# Altium PCB UC-526 - 2.PcbDoc
Units mil, origin at the board's own origin, x right, y up, seen from the top; angles counter-clockwise.
Board outline 1574.8 x 1574.8 mil, 2 copper layers (Top Layer, Bottom Layer); 116 components, 127 nets, 544 pads, 98 vias.
Unrouted connection lines stored in the file: 1.
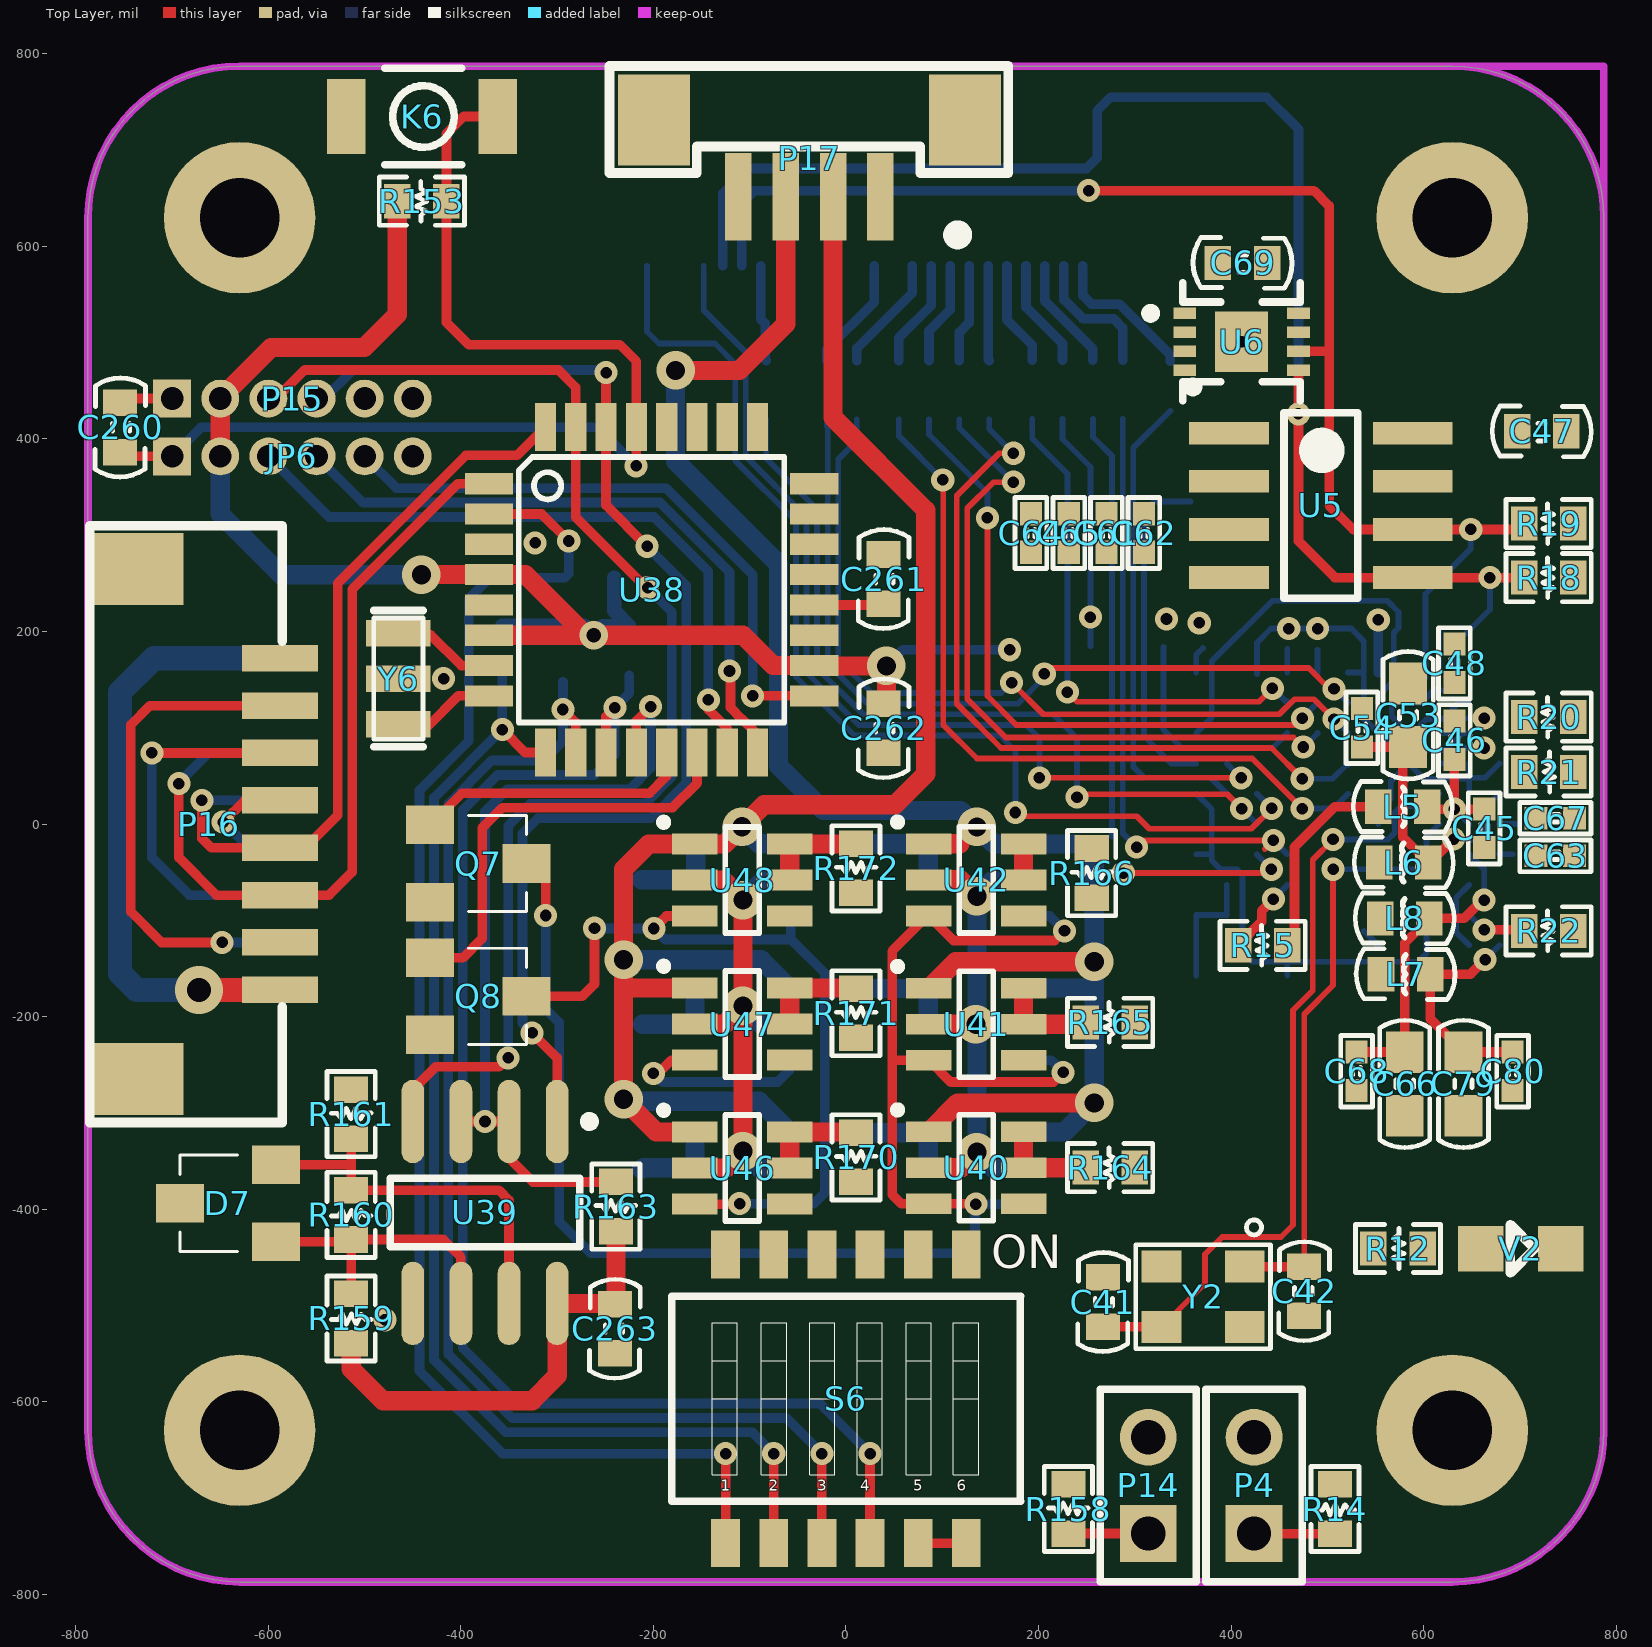
[diagram p0: Top Layer view]
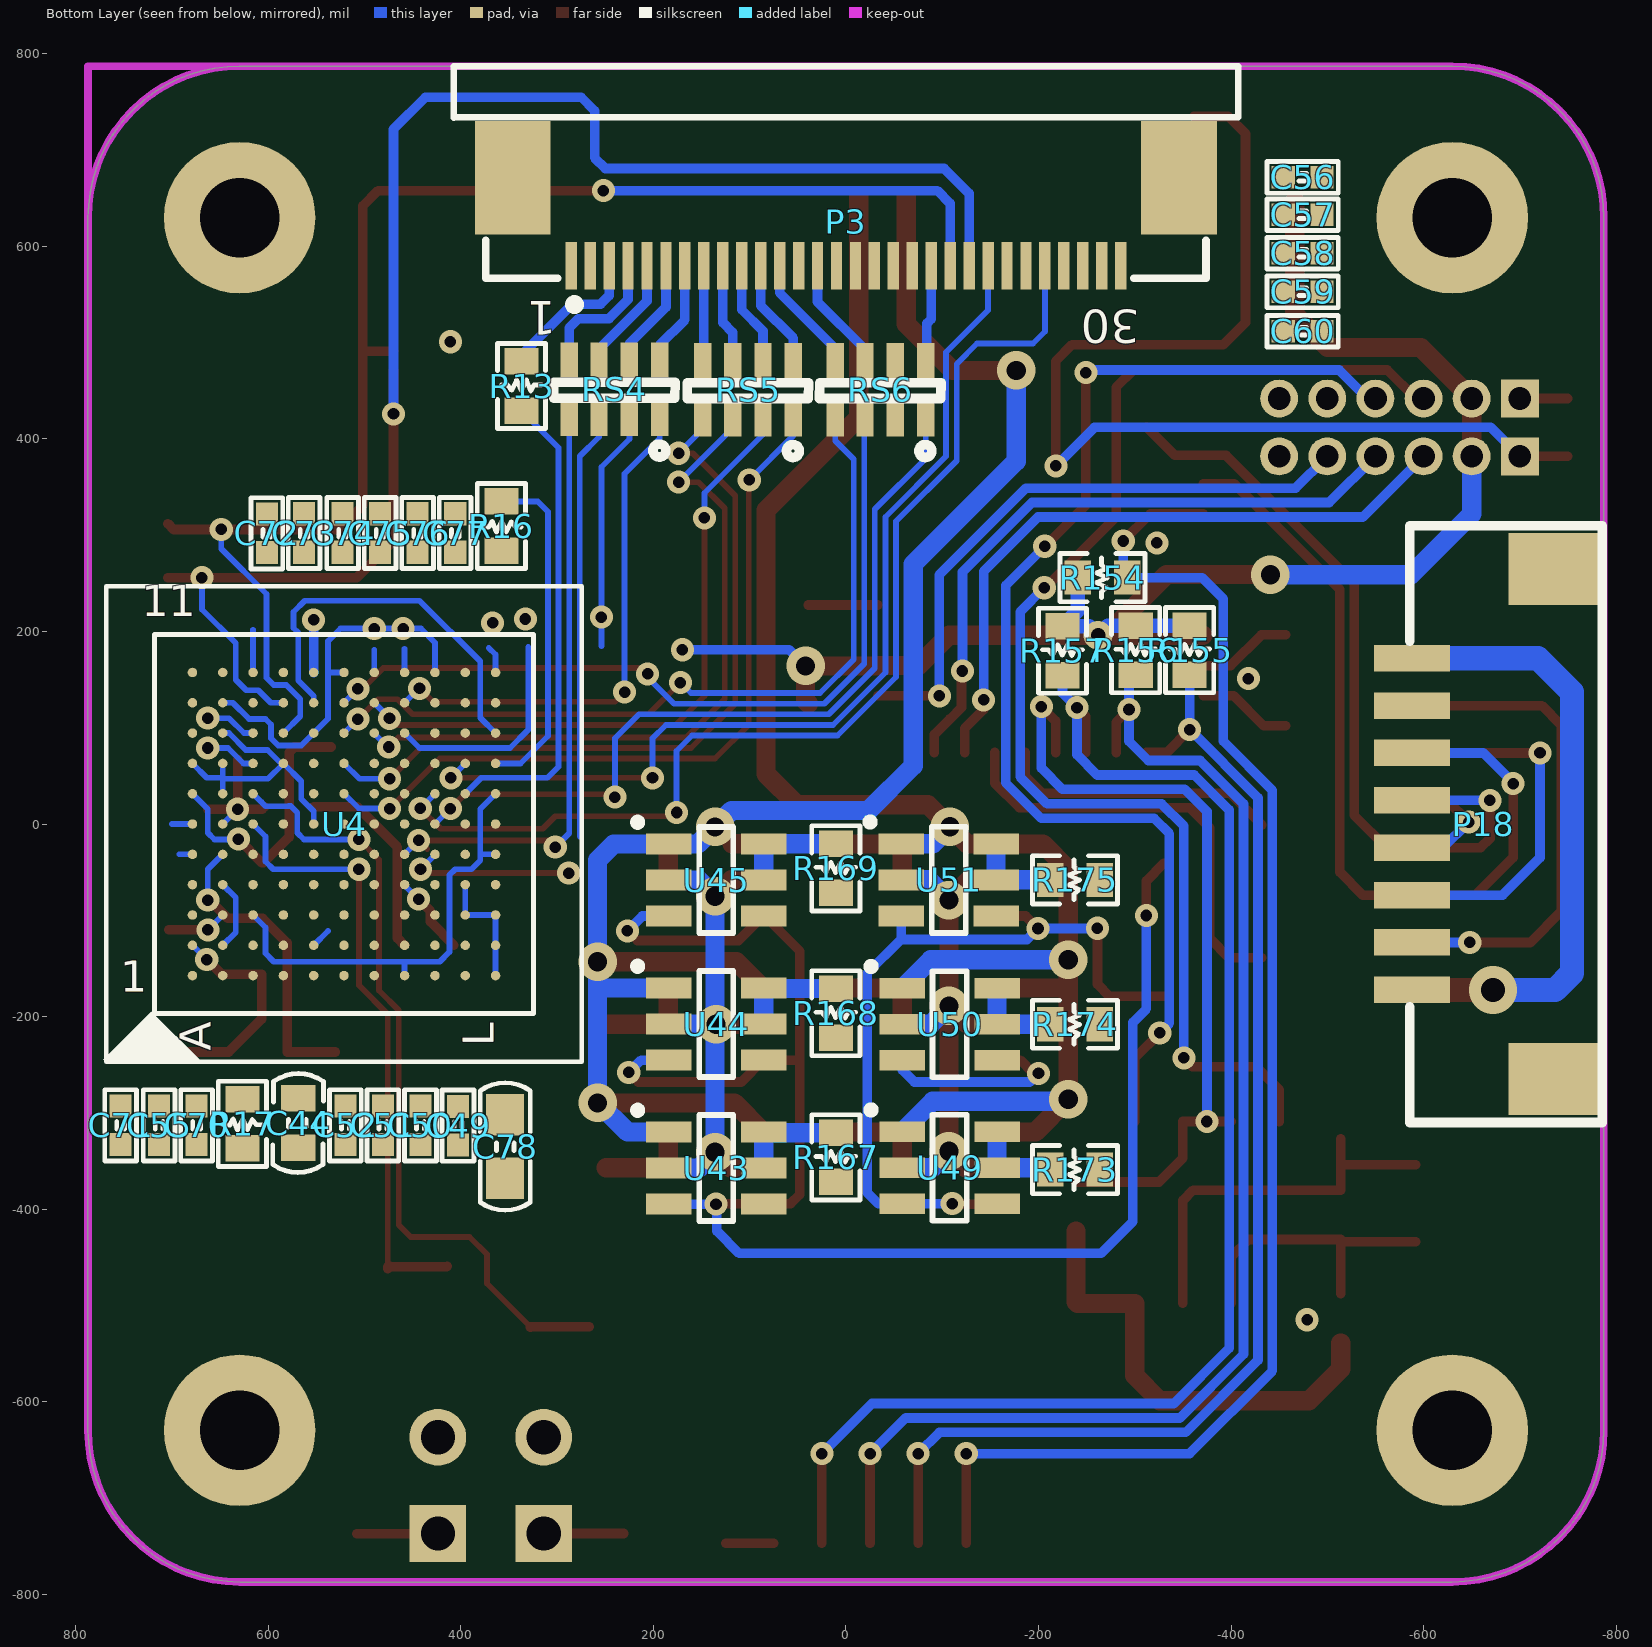
[diagram p1: Bottom Layer view, seen from below]

## Layer stack, top to bottom
Top Layer: signal copper 1.4
Dielectric: dielectric 12.6, FR-4, Dk 4.8
Bottom Layer: signal copper 1.4

## Board outline
-787.4,-629.92 -787.4,629.92 cw(c-629.92,629.92) -629.92,787.4 629.92,787.4 cw(c629.92,629.92) 787.4,629.92 787.4,-629.92 cw(c629.92,-629.92) 629.92,-787.4 -629.92,-787.4 cw(c-629.92,-629.92)

## Design rules (kind name [scope] priority, off if disabled: settings)
Clearance [All] p1: gap=5
DiffPairsRouting [All] p1: maxlimit=10 minlimit=10 mostfreqgap=10 maxuncoupledlength=500
PolygonConnect [All] p1: connectstyle=Relief reliefconductorwidth=10 reliefentries=4 polygonreliefangle="90 Angle"
RoutingVias [All] p1: holewidth=28 width=50 viastyle="Through Hole" minholewidth=28 minwidth=50 maxholewidth=28 maxwidth=50
SilkscreenOverComponentPads [All] p1: minsilkscreentomaskgap=10
SolderMaskExpansion [All] p1: expansion=4
Width [All] p1: maxlimit=50 minlimit=5 preferedwidth=10
26 further rules are at their usual default settings.

## Classes and differential pairs
differential pair SST: +SST_P -SST_N

## Components (designator, comment, footprint, x,y, rotation, side; value= is the part's Value field where it differs from the comment)
C41 "12pF" 0603S-CAP 267,-496.59 r270 top
C42 "12pF" 0603S-CAP 476,-485.41 r90 top
C44 "0.1u" 0603S-CAP 569,-310.59 r90 bottom
C45 "0.1u" C0402 663,-4.41 r270 top
C46 "0.01u" C0402 632,87 r90 top
C47 "0.1uF" 0603S-CAP 722.8,408 r180 top
C48 "0.1u" C0402 632,167 r270 top
C49 "0.01u" C0402 403,-313.31 r270 bottom
C50 "0.01u" C0402 442,-313 r270 bottom
C51 "0.01u" C0402 481,-313 r270 bottom
C52 "0.01u" C0402 520,-313 r270 bottom
C53 "2.2u" C0805S-CAP 584,113 r90 top
C54 "0.1u" C0402 536,100 r90 top
C55 "0.01u" C0402 713.5,-313 r270 bottom
C56 "0.01u" C0402 -474.31,671.84 r180 bottom
C57 "0.01u" C0402 -474.31,632.92 r180 bottom
C58 "0.01u" C0402 -474.31,592.92 r180 bottom
C59 "0.01u" C0402 -474.31,552.92 r180 bottom
C60 "0.01u" C0402 -474.31,511.92 r180 bottom
C61 "0.1u" C0402 270.5,302.31 r90 top
C62 "0.1u" C0402 309.5,302.31 r90 top
C63 "0.1u" C0402 737,-33 r180 top
C64 "0.1u" C0402 192.08,302.31 r90 top
C65 "0.1u" C0402 231.5,302.31 r90 top
C66 "22u" C0805S-CAP 580.5,-270 r270 top
C67 "0.1u" C0402 737,6 r180 top
C68 "0.1u" C0402 530.5,-256.82 r270 top
C69 "0.1u" 0603S-CAP 412,583 r180 top
C70 "0.1u" C0402 674.58,-313 r270 bottom
C71 "0.1u" C0402 753.5,-313 r270 bottom
C72 "0.1u" C0402 601.5,302 r90 bottom
C73 "0.1u" C0402 562.84,302.31 r90 bottom
C74 "0.1u" C0402 522.92,302.31 r90 bottom
C75 "0.1u" C0402 483.92,302.31 r90 bottom
C76 "0.1u" C0402 444.92,302.31 r90 bottom
C77 "0.1u" C0402 405.92,302.31 r90 bottom
C78 "22u" C0805S-CAP 354,-335 r270 bottom
C79 "22u" C0805S-CAP 641.5,-270 r270 top
C80 "0.1u" C0402 692.5,-256.82 r270 top
C260 "0.1uF" C0603 -754,412 r90 top
C261 "0.1uF" C0603 39,254.41 r90 top
C262 "0.1uF" C0603 39,99.41 r90 top
C263 "0.1u" C0603 -240,-524.39 r270 top
D7 "SM712" SOT23-3 -642,-394 r90 top
JP6 "Header 3X2" MHDR1X6 -700,382 r0 top
K6 "SW-PB" 157SW -519,735 r180 top
L5 "磁珠" L0603 578.41,18 r180 top
L6 "磁珠" L0603 579.41,-40 r0 top
L7 "磁珠" L0603 581.41,-156 r0 top
L8 "磁珠" L0603 580.41,-98 r0 top
P3 "30PIN" FH12-30S-0.5SH 0,625.55 r180 bottom locked
P4 "Header 2" HDR1X2 424,-737 r90 top
P14 "Header 2" HDR1X2 314,-737 r90 top
P15 "FTDI Basic" MHDR1X6 -700,442 r0 top
P16 "Header 8" SH_1.25MM*8 -735.66,0 r270 top locked
P17 "Header 4" SMT_1.25MM*4 -38,692 r0 top
P18 "Header 8" SH_1.25MM*8 -735.66,0 r90 bottom locked
Q7 "BSS138" "SOT-23 (STANDARD)" -432,-1 r270 top
Q8 "BSS138" "SOT-23 (STANDARD)" -432,-139 r270 top
R12 "10K" 0603S-RES 573.41,-441 r180 top
R13 "0" 0603S-RES 337,455 r270 bottom
R14 "4.7K" 0603S-RES 508,-711.59 r90 top
R15 "4.7K" 0603S-RES 432.88,-125.96 r0 top
R16 "4.7K" 0603S-RES 358,309.53 r90 bottom
R17 "4.7K" 0603S-RES 627,-311.41 r90 bottom
R18 "4.7K" 0603S-RES 730,256 r0 top
R19 "4.7K" 0603S-RES 730,312 r0 top
R20 "0" 0603S-RES 730,111 r0 top
R21 "6.04K-1%" 0603S-RES 730,54 r180 top
R22 "200-1%" 0603S-RES 730,-111 r0 top
R153 "10K" R0603 -440.59,647 r180 top
R154 "10K" R0603 -266.41,256 r0 bottom
R155 "10K" R0603 -357,180.59 r90 bottom
R156 "10K" R0603 -301,180.59 r90 bottom
R157 "10K" R0603 -225,180 r90 bottom
R158 "10K" R0603 231,-711.59 r90 top
R159 "4.7K" R0603 -514,-513.59 r270 top
R160 "120" R0603 -514,-406 r270 top
R161 "4.7K" R0603 -514,-301.41 r90 top
R163 "10K" R0603 -239,-397.41 r90 top
R164 "5.1" R0603 274.49,-357 r180 top
R165 "5.1" R0603 274.49,-206 r180 top
R166 "5.1" R0603 255.28,-51 r90 top
R167 "5.1" R0603 10.5,-346.21 r90 bottom
R168 "5.1" R0603 10.5,-196.55 r90 bottom
R169 "5.1" R0603 10.5,-45.96 r90 bottom
R170 "5.1" R0603 10.5,-346.21 r90 top
R171 "5.1" R0603 10.5,-196.55 r90 top
R172 "5.1" R0603 10.5,-45.96 r90 top
R173 "5.1" R0603 -237.92,-359 r0 bottom
R174 "5.1" R0603 -237.92,-208 r0 bottom
R175 "5.1" R0603 -237.92,-58 r0 bottom
RS4 "22" NC06-4 193.1,420.84 r0 bottom
RS5 "22" NC06-4 54.34,420.33 r0 bottom
RS6 "22" NC06-4 -83.17,420.33 r0 bottom
S6 "SW DIP-6" DIP_SW_6WAY_SMD 0,-597 r0 top locked
U4 "FX3_121_BUMP_0" 121_BGA_FX3 521.45,0 r90 bottom locked
U5 "M24M02-DRMN6TP" SOIC127P600X175-8N 493.42,331 r0 top
U6 "ATSHA204-MAH-DA-T" UDFN 411,501 r0 top
U38 "ATMEGA328" TQFP32-08 -202,243.34 r0 top locked
U39 "MAX485CSA" SOIC-8 -375,-403.51 r270 top
U40 "AL5802" SOT26 135.28,-357 r0 top
U41 "AL5802" SOT26 135.28,-208 r0 top
U42 "AL5802" SOT26 135.28,-58 r0 top
U43 "AL5802" SOT26 134.72,-357.4 r180 bottom
U44 "AL5802" SOT26 134.72,-207.79 r180 bottom
U45 "AL5802" SOT26 134.72,-58.19 r180 bottom
U46 "AL5802" SOT26 -107.72,-357.4 r0 top
U47 "AL5802" SOT26 -107.72,-207.79 r0 top
U48 "AL5802" SOT26 -107.72,-58.19 r0 top
U49 "AL5802" SOT26 -107.72,-357 r180 bottom
U50 "AL5802" SOT26 -107.72,-208 r180 bottom
U51 "AL5802" SOT26 -106.72,-58 r180 bottom
V2 "Red" LED0805S 701,-441 r0 top
Y2 "19.2MHZ" "爱普生晶振3.2×2.5MM - 无源" 371,-491 r180 top
Y6 "16MHz" RESONATOR-SMD -465,151 r90 top

## Footprints (in the part's own frame and the unit in brackets; to place one, negate y for a bottom-side part, rotate by r counter-clockwise, add the part's x,y. Pads: shape width x height; smd on the part's side, far side on the other; paste and mask are expansions set on the pad)
121_BGA_FX3 [mil]
  round 9.85 smd: A1(-157.45,157.45) A2(-125.96,157.45) A3(-94.47,157.45) A4(-62.98,157.45) A5(-31.49,157.45) A6(0,157.45) A7(31.49,157.45) A8(62.98,157.45) A9(94.47,157.45) A10(125.96,157.45) A11(157.45,157.45) B1(-157.45,125.96) B2(-125.96,125.96) B3(-94.47,125.96) B4(-62.98,125.96) B5(-31.49,125.96) B6(0,125.96) B7(31.49,125.96) B8(62.98,125.96) B9(94.47,125.96) B10(125.96,125.96) B11(157.45,125.96) C1(-157.45,94.47) C2(-125.96,94.47) C3(-94.47,94.47) C4(-62.98,94.47) C5(-31.49,94.47) C6(0,94.47) C7(31.49,94.47) C8(62.98,94.47) C9(94.47,94.47) C10(125.96,94.47) C11(157.45,94.47) D1(-157.45,62.98) D2(-125.96,62.98) D3(-94.47,62.98) D4(-62.98,62.98) D5(-31.49,62.98) D6(0,62.98) D7(31.49,62.98) D8(62.98,62.98) D9(94.47,62.98) D10(125.96,62.98) D11(157.45,62.98) E1(-157.45,31.49) E2(-125.96,31.49) E3(-94.47,31.49) E4(-62.98,31.49) E5(-31.49,31.49) E6(0,31.49) E7(31.49,31.49) E8(62.98,31.49) E9(94.47,31.49) E10(125.96,31.49) E11(157.45,31.49) F1(-157.45,0) F2(-125.96,0) F3(-94.47,0) F4(-62.98,0) F5(-31.49,0) F6(0,0) F7(31.49,0) F8(62.98,0) F9(94.47,0) F10(125.96,0) F11(157.45,0) G1(-157.45,-31.49) G2(-125.96,-31.49) G3(-94.47,-31.49) G4(-62.98,-31.49) G5(-31.49,-31.49) G6(0,-31.49) G7(31.49,-31.49) G8(62.98,-31.49) G9(94.47,-31.49) G10(125.96,-31.49) G11(157.45,-31.49) H1(-157.45,-62.98) H2(-125.96,-62.98) H3(-94.47,-62.98) H4(-62.98,-62.98) H5(-31.49,-62.98) H6(0,-62.98) H7(31.49,-62.98) H8(62.98,-62.98) H9(94.47,-62.98) H10(125.96,-62.98) H11(157.45,-62.98) J1(-157.45,-94.47) J2(-125.96,-94.47) J3(-94.47,-94.47) J4(-62.98,-94.47) J5(-31.49,-94.47) J6(0,-94.47) J7(31.49,-94.47) J8(62.98,-94.47) J9(94.47,-94.47) J10(125.96,-94.47) J11(157.45,-94.47) K1(-157.45,-125.96) K2(-125.96,-125.96) K3(-94.47,-125.96) K4(-62.98,-125.96) K5(-31.49,-125.96) K6(0,-125.96) K7(31.49,-125.96) K8(62.98,-125.96) K9(94.47,-125.96) K10(125.96,-125.96) K11(157.45,-125.96) L1(-157.45,-157.45) L2(-125.96,-157.45) L3(-94.47,-157.45) L4(-62.98,-157.45) L5(-31.49,-157.45) L6(0,-157.45) L7(31.49,-157.45) L8(62.98,-157.45) L9(94.47,-157.45) L10(125.96,-157.45) L11(157.45,-157.45)
  silkscreen extent -247,-247 247,250
157SW [mil]
  rect 40x78 smd: 1(0,0) 2(-157.5,0)
  silkscreen extent -120,-50 -40,50
0603S-CAP [mm]
  rect 0.7x0.9 smd: 1(-0.65,0) 2(0.65,0)
  silkscreen extent -1.31,-0.67 1.31,0.67
0603S-RES [mm]
  rect 0.7x0.9 smd: 1(-0.65,0) 2(0.65,0)
  silkscreen extent -1.12,-0.64 1.12,0.64
C0402 [mil]
  rect 24x23 smd: 1(-20,0) 2(20,0)
  silkscreen extent -37,-17 37,17, body extent -20,-10 19,10, height 20
C0603 [mm]
  rect 0.7x0.9 smd: 1(0.65,0) 2(-0.65,0)
  silkscreen extent -1.31,-0.67 1.31,0.67
C0805S-CAP [mm]
  rect 1.1x1 smd: 1(0.838,0) 2(-0.838,0)
  silkscreen extent -1.68,-0.66 1.68,0.66
DIP_SW_6WAY_SMD [mm]
  rect 0.76x1.27 smd: 1(-3.175,-3.81) 2(-1.905,-3.81) 3(-0.635,-3.81) 4(0.635,-3.81) 5(1.905,-3.81) 6(3.175,-3.81) 7(3.175,3.81) 8(1.905,3.81) 9(0.635,3.81) 10(-0.635,3.81) 11(-1.905,3.81) 12(-3.175,3.81)
  silkscreen extent -4.6,-2.7 4.6,2.7
FH12-30S-0.5SH [mm]
  rect 0.3x1.25 smd: 1(-7.25,-1.162) 2(-6.75,-1.162) 3(-6.25,-1.162) 4(-5.75,-1.162) 5(-5.25,-1.162) 6(-4.75,-1.162) 7(-4.25,-1.162) 8(-3.75,-1.162) 9(-3.25,-1.162) 10(-2.75,-1.162) 11(-2.25,-1.162) 12(-1.75,-1.162) 13(-1.25,-1.162) 14(-0.75,-1.162) 15(-0.25,-1.162) 16(0.25,-1.162) 17(0.75,-1.162) 18(1.25,-1.162) 19(1.75,-1.162) 20(2.25,-1.162) 21(2.75,-1.162) 22(3.25,-1.162) 23(3.75,-1.162) 24(4.25,-1.162) 25(4.75,-1.162) 26(5.25,-1.162) 27(5.75,-1.162) 28(6.25,-1.162) 29(6.75,-1.162) 30(7.25,-1.162)
  rect 2x3 smd: 31(-8.79,1.163) 31(8.79,1.163)
  silkscreen extent -10.35,-2.31 10.35,4.11
HDR1X2 [mm]
  rect 1.5x1.5 hole 0.9: 1(0,0)
  round 1.5 hole 0.9: 2(2.54,0)
  silkscreen extent -1.27,-1.27 3.81,1.27
L0603 [mm]
  rect 0.7x0.9 smd: 1(-0.65,0) 2(0.65,0)
  silkscreen extent -1.31,-0.67 1.31,0.67
LED0805S [mm]
  rect 1.2x1.2 smd: 1(-1.05,0) 2(1.05,0)
  silkscreen extent -0.27,-0.64 0.36,0.63, body extent -0.98,-0.46 1.08,0.45, height 0.85
MHDR1X6 [mm]
  rect 1x1 hole 0.6: 1(0,0)
  round 1 hole 0.6: 2(1.27,0) 3(2.54,0) 4(3.81,0) 5(5.08,0) 6(6.35,0)
NC06-4 [mil]
  rect 18x36 smd: 1(94.4,-0.16) 2(63.39,-0.16) 3(31.9,-0.16) 4(0.4,-0.16) 5(0.4,-61.16) 6(31.9,-61.16) 7(63.39,-61.16) 8(94.4,-61.16)
  silkscreen extent -16,-38 111,40
R0603 [mm]
  rect 0.7x0.9 smd: 1(0.65,0) 2(-0.65,0)
  silkscreen extent -1.12,-0.64 1.12,0.64
RESONATOR-SMD [mm]
  rect 0.7x1.7 smd: 1(-1.2,0) 2(0,0) 3(1.2,0)
  silkscreen extent -1.8,-0.65 1.8,0.65
SH_1.25MM*8 [mm]
  rect 0.7x2 smd: 1(-4.375,3.75) 2(-3.125,3.75) 3(-1.875,3.75) 4(-0.625,3.75) 5(0.625,3.75) 6(1.875,3.75) 7(3.125,3.75) 8(4.375,3.75)
  rect 1.9x2.4 smd: 9(-6.731,0) 9(6.731,0)
  silkscreen extent -7.87,-1.27 7.87,3.81
SMT_1.25MM*4 [mm]
  rect 0.7x2.3 smd: 1(1.875,-1.025) 2(0.625,-1.025) 3(-0.625,-1.025) 4(-1.875,-1.025)
  rect 1.9x2.4 smd: 7(-4.1,1) 7(4.1,1)
  silkscreen extent -5.28,-2.16 5.25,2.42
SOIC127P600X175-8N [mm]
  rect 2.1x0.6 smd: 1(-2.425,1.905) 2(-2.425,0.635) 3(-2.425,-0.635) 4(-2.425,-1.905) 5(2.425,-1.905) 6(2.425,-0.635) 7(2.425,0.635) 8(2.425,1.905)
  silkscreen extent -3.5,-2.45 0.98,3.25, body extent -1.95,-2.45 1.95,2.45, height 1.75
SOIC-8 [mm]
  oval 2.2x0.6 smd: 1(-2.4,1.905) 2(-2.4,0.635) 3(-2.4,-0.635) 4(-2.4,-1.905) 5(2.4,-1.905) 6(2.4,-0.635) 7(2.4,0.635) 8(2.4,1.905)
  silkscreen extent -2.52,-2.5 0.9,2.88, body extent -2,-2.5 2,2.5, height 1.75
SOT23-3 [mil]
  rect 40x50 smd: 1(40,-50) 2(-40,-50) 3(0,50)
  silkscreen extent -50,-10 50,50, body extent -59,-52 59,46, height 42
SOT26 [mm]
  rect 1.2x0.55 smd: 1(-1.25,0.95) 2(-1.25,0) 3(-1.25,-0.95) 4(1.25,-0.95) 5(1.25,0) 6(1.25,0.95)
  silkscreen extent -2.17,-1.4 0.45,1.62
"SOT-23 (STANDARD)" [mil]
  rect 40x50 smd: D(40,100) G(0,0) S(80,0)
  silkscreen extent -10,40 90,100, body extent -19,-2 99,96, height 42
TQFP32-08 [mil]
  rect 50x22 smd: 1(-169,110.24) 2(-169,78.74) 3(-169,47.25) 4(-169,15.75) 5(-169,-15.74) 6(-168.99,-47.24) 7(-169,-78.74) 8(-169,-110.24) 17(169.01,-110.23) 18(169,-78.73) 19(169,-47.24) 20(169,-15.74) 21(169,15.75) 22(169,47.25) 23(169,78.74) 24(169,110.24)
  rect 22x50 smd: 9(-110.24,-169) 10(-78.74,-169) 11(-47.24,-168.99) 12(-15.74,-168.99) 13(15.75,-169) 14(47.25,-169) 15(78.74,-169) 16(110.24,-169) 25(110.24,169) 26(78.74,169) 27(47.25,169) 28(15.75,169) 29(-15.75,169) 30(-47.24,169) 31(-78.73,169) 32(-110.23,169)
  silkscreen extent -138,-138 138,138
UDFN [mm]
  rect 0.6x0.3 smd: 1(-1.5,0.75) 2(-1.5,0.25) 3(-1.5,-0.25) 4(-1.5,-0.75) 5(1.5,-0.75) 6(1.5,-0.25) 7(1.5,0.25) 8(1.5,0.75)
  rect 1.4x1.6 smd: 4(0,0)
  silkscreen extent -2.52,-1.55 1.55,1.55, body extent -1.5,-1 1.52,1, height 0.6
"爱普生晶振3.2×2.5MM - 无源" [mm]
  rect 1.05x0.85 smd: 1(-1.1,-0.8) 2(1.1,0.8) 3(1.1,-0.8) 4(-1.1,0.8)
  Top Layer pour cut-out: -1.778,1.372 -1.778,-1.372 1.778,-1.372 1.778,1.372
  silkscreen extent -1.78,-2.03 1.78,1.37

## Part data
C41 C42: library part "CAP CER SMT 4.3pF 0805", "CAP CER SMT 4.3pF 0805"
C44: library part Cap, "50V/8.2u/0805"
C45 C46 C48 C49 C50 C51 C52 C53 C54 C55 C56 C57 C58 C59 C60 C61 C62 C63 C64 C65 C66 C67 C68 C70 C71 C72 C73 C74 C75 C76 C77 C78 C79 C80: library part CAP0805, "Capacitor"
C47: library part "CAP SMT 0.1uF 16V X7R", "CAP SMT 0.1uF 16V X7R"
C69: library part CAP, "RC=1206"
C260 C261 C262: library part "CAP SMT C100nF25V10%X7R", "Capacitor"
C263: library part Cap, "Capacitor"
JP6: "Header, 3-Pin, Dual row"
K6: "Switch"
L5 L6 L7 L8: library part Inductor, "Inductor"
P3: library part "Header 30", "Header, 30-Pin"
P4 P14: "Header, 2-Pin"
P15: library part ARDUINO_SERIAL_PROGRAMPTH
P16 P18: "Header, 8-Pin"
P17: "Header, 4-Pin"
Q7 Q8: library part NMOS
R12 R13 R14 R15 R16 R17 R18 R19 R20 R21 R22 R153 R154 R155 R156 R157 R158 R159 R160 R161 R163 R164 R165 R166 R167 R168 R169 R170 R171 R172 R173 R174 R175: library part Res2, "Resistor"
RS4 RS5 RS6: library part RN4
S6: "DIP Switch, 6 Position, SPST"
U5: library part 24LC64-I/SN, "IC EEPROM 64KBIT 400KHZ 8SOIC"
U6: library part AT24C128
U38: library part ATMEGA168
U39: library part MAX3485CSA
V2: library part LED0, "Typical INFRARED GaAs LED"
Y2: library part "XTAL 32.768KHZ", "Crystal, CRYSTAL 32.768KHZ 6PF SMD"
Y6: library part RESONATORSMD

## Free pads (board coordinates)
  round 157.48 hole 82.68: 0(-629.92,-629.92) 0(-629.92,629.92) 0(629.92,-629.92) 0(629.92,629.92)

## Via types
v1: diameter 24, hole 12, Top Layer to Bottom Layer, tented both sides, 80 vias
v2: diameter 40, hole 20, Top Layer to Bottom Layer, tented both sides, 15 vias
v3: diameter 50, hole 25, Top Layer to Bottom Layer, tented both sides, 1 vias
v4: diameter 30, hole 15, Top Layer to Bottom Layer, tented both sides, 1 vias
v5: diameter 24, hole 12, Top Layer to Bottom Layer, 1 vias

## Nets (pads, with @x,y where several pads share a name; then routed paths per layer and width w, separated by ;. In a path a pad name is that pad's centre, name@x,y a point inside that pad or via, vN(x,y) a via of type N, cw(c..) or ccw(c..) an arc to the next point about the centre after c; other vN are vias at no path point)
A0: U38.23
A1: U38.24
A2: U38.25
A3: U38.26
A4: U38.27
A5: U38.28
A6: U38.19
A7: U38.22
AD1: R154.2 S6.1 U38.2 | length 1514.6
  Top Layer w10: U38.2 -316.09,322.09 v1(-288,294) ; S6.1 v1(-125,-654)
  Bottom Layer w10: v1@-287,293 v1(-288,294) -288,260 R154.2 -366,256 -370,256 -392,234 -392,86 -443,35 -443,-568 -357,-654 v1(-125,-654)
AD2: R155.2 S6.2 U38.9 | length 1282.3
  Top Layer w10: v1(-357,98) -333.34,74.34 U38.9 ; S6.2 v1(-75,-654)
  Bottom Layer w10: R155.2 v1(-357,98) -357.21,98 -428,27.21 -428,-557 -353,-632 -97,-632 v1(-75,-654)
AD3: R156.2 S6.3 U38.10 | length 1353.6
  Top Layer w10: v1(-294,119) -280.74,105.74 U38.10 ; S6.3 v1(-25,-654)
  Bottom Layer w10: R156.2@-294,148 v1(-294,119) -294,86 -314,66 -325,66 -368,66 -413,21 -413,-550.79 -346.79,-617 -62,-617 v1(-25,-654)
AD4: R157.2 S6.4 U38.11 | length 1441.5
  Top Layer w10: U38.11 -249.24,111.76 v1(-240,121) ; S6.4 v1(25,-654)
  Bottom Layer w10: R157.2 -225,136 v1(-240,121) -240,72 -261,51 -361.79,51 -398,14.79 -398,-544.57 -340.57,-602 -27,-602 v1(25,-654)
AREF: C261.2 U38.20 | length 72
  Top Layer w10: U38.20 C261.2@39,227.6
AVDD: C53.2 C54.1 L6.2 U4.A7 | length 302.6
  Top Layer w10: C54.1@535,80 572.82,80 578.41,74.41 578.41,-13.41 L6.2 606.93,-40 v1(631.18,-15.75)
  Bottom Layer w6: v1(631.18,-15.75) 625.75,-15.75 625.75,-14 632,-14 634,-16 656,-16 663,-9 663,15.59 U4.A7
CLK_OUT: U4.D6
D0_IO: P3.18
D1_IO: P3.17
D2: P16.5 P18.5 S6.8 U38.32 | length 805.9
  Top Layer w10: v1@-669,25 -669,-15 -659.39,-24.61 P16.5 ; P16.5@-586.63,-26 P16.5 ; U38.32 -341.58,383 -395,383 -528,250 -528,9 -561.61,-24.61 P16.5
  Bottom Layer w10: v1(-669,24.61) P18.5
D2_IO: P3.16
D3: P16.6 P18.6 S6.7 U38.1 | length 883
  Top Layer w10: v1@-693,43 -693,-35 -654.18,-73.82 P16.6 -536.82,-73.82 -513,-50 -513,243.79 -403.21,353.58 U38.1
  Bottom Layer w10: v1@-693,43 -662.18,73.82 P18.6
  other v1: -693,42
D3_IO: P3.15
D4_IO: P3.14 RS6.7 | length 118.7
  Bottom Layer w10: RS6.7 -19.78,493.22 29.53,542.53 P3.14
D5_IO: P3.12 RS6.8 | length 122.2
  Bottom Layer w10: RS6.8 11.23,494.23 68.9,551.9 P3.12
D6_IO: P3.11 RS5.5 | length 112.3
  Bottom Layer w10: RS5.5 54.74,504.74 88.58,538.58 P3.11
D7_IO: P3.10 RS5.6 | length 107.4
  Bottom Layer w10: RS5.6 86.23,512.23 108.27,534.27 P3.10
D8: R163.1 U38.12 U39.2 U39.3 | length 839.7
  Top Layer w10: U39.3 v1(-375,-309.02) U39.2 -350,-347 -325.18,-371.82 R163.1 ; U38.12 -217.75,107.25 v1(-203,122)
  Bottom Layer w10: v1(-375,-309.02) -375,13 -352,36 -225,36 -203,58 v1(-203,122)
D8_IO: P3.9 RS5.7 | length 102.5
  Bottom Layer w10: RS5.7 117.73,510.73 127.95,520.95 P3.9
D9: Q7.G U38.13 | length 291.4
  Top Layer w10: Q7.G -399,32 -204,32 -186.25,49.75 U38.13
D9_IO: P3.8 RS5.8 | length 98.7
  Bottom Layer w10: P3.8 147.64,482.6 RS5.8
D10: Q8.G U38.14 | length 463.8
  Top Layer w10: Q8.G -398,-139 -378,-119 -378,-4 -357,17 -248,17 ; -260,17 -248,17 ; U38.14 -154.75,42.25 -180,17 -248,17
D10_IO: P3.7 RS4.5 | length 108.6
  Bottom Layer w10: P3.7 167.32,523.68 193.5,497.5 RS4.5
D11_IO: P3.6 RS4.6 | length 113.5
  Bottom Layer w10: P3.6 187.01,536.99 225,499 RS4.6
DTR: C260.1 P15.1 | length 56.7
  Top Layer w10: C260.1@-749.59,442 P15.1 ; P15.1@-694,430 P15.1@-689,435
FRV_IO: P3.4 RS4.8 | length 141.7
  Bottom Layer w10: P3.4 226.38,544.84 246.21,525 278,525 287.5,515.5 RS4.8
FX3_CTL0: P3.23 U4.K8 | length 1008.6
  Top Layer w6: v1(201,48) v1(410.47,48)
  Bottom Layer w6: P3.23 -147.64,533.64 -104,490 -104,382 -41,319 -41,157.33 13.33,103 187,103 201,89 v1(201,48) ; U4.K8 v1(410.47,48)
FX3_CTL1: R13.2 U4.K7 | length 494.4
  Bottom Layer w6: R13.2 298.5,390.91 298.5,59.5 310,48 378.98,48 U4.K7
FX3_CTL2: P3.26 U4.J7 | length 1152.5
  Top Layer w6: v1(176,12) 180,8 302,8 315,-5 420.95,-5 v1(442.21,16.26)
  Bottom Layer w6: P3.26 -206.69,511.69 -194.19,499.19 -136.19,499.19 -115,478 -115,377.44 -52,314.44 -52,152.77 8.77,92 160,92 176,76 v1(176,12) ; U4.J7 v1(442.21,16.26)
FX3_CTL3: U4.H7
FX3_CTL4_SW: U4.G7
FX3_CTL5: U4.G6
FX3_CTL6: U4.K6
FX3_CTL7: U4.H8
FX3_CTL8: U4.G5 V2.2
FX3_CTL11: RS4.2 U4.J5 | length 619.7
  Top Layer w6: v1(288,-51) 438,-51 v1(442,-47)
  Bottom Layer w6: RS4.2 256.5,402.01 276.5,382 276.5,-13 ; U4.J5 426.98,-31.98 v1(442,-47)
FX3_CTL12: RS4.1 U4.H5 | length 629.1
  Top Layer w6: v1(302,-24) 309,-17 v1(443.98,-17) 434.98,-26
  Bottom Layer w6: RS4.1 287.5,-9.5 v1(302,-24) ; v1(443.98,-17) U4.H5
FX3_CTL15: R16.2 U4.L8 | length 352.2
  Bottom Layer w6: R16.2 320.12,335.12 309.5,324.5 309.5,91.48 338,62.98 U4.L8
FX3_DQ0: RS6.2 U4.F10 | length 846.8
  Top Layer w6: v1(206,156) 212,162 480.64,162 502.23,140.41 v1(507,140.41) v1@506.68,140.73
  Bottom Layer w6: RS6.2@-19.77,413.19 RS6.2 -19,419.72 -19,166.44 22.44,125 178.64,125 v1@204.79,151.16 ; v1(507,140.41) U4.F10
FX3_DQ1: RS6.1 U4.F9 | length 844
  Top Layer w6: v1(172,147) 205,114 450.2,114 465.93,129.73 486.19,129.73 v1(507,108.92) v1@507,112.13
  Bottom Layer w6: RS6.1 11.23,398.23 -8,379 -8,171 27,136 161,136 v1(172,147) ; v1(507,108.92) U4.F9
FX3_DQ2: RS5.4 U4.F7 | length 806.2
  Top Layer w6: v1@101,357.5 101,103 136,68 422,68 v1(474,16)
  Bottom Layer w6: RS5.4@54.74,413.68 RS5.4 54.74,403.26 v1(100.5,357.5) ; v1(474,16) 505.96,16 U4.F7
FX3_DQ3: RS5.3 U4.G10 | length 698.2
  Top Layer w6: v1(147,318) 147,133 177,103 467.48,103 v1(474.21,109.73)
  Bottom Layer w6: RS5.3@86.23,413.68 RS5.3 86.23,404.77 147,344 v1(147,318) ; v1(474.21,109.73) v1@474.21,108.43 ; U4.G10 474.87,110.87 474.87,109.08 v1@474.21,108.43 ; v1@474.21,108.43 471,105.21 474.21,105.21 v1@474.21,108.43
FX3_DQ4: RS5.2 U4.G9 | length 743.7
  Top Layer w6: v1(173.87,355.13) 153.13,355.13 126,328 126,130 166,90 465,90 v1(475,80)
  Bottom Layer w6: RS5.2 117.73,411.27 v1@179,350 ; v1@475.5,79.5 489.96,93.96 U4.G9
FX3_DQ5: RS5.1 U4.F8 | length 793.8
  Top Layer w6: v1(173.87,385.13) 159.13,385.13 115,341 115,125 161,79 345,79 ; 337,79 345,79 ; v1(474,47) 442,79 345,79
  Bottom Layer w6: RS5.1 148.74,410.26 v1(173.87,385.13) ; v1(474,47) 505.47,47 U4.F8 U4.F8@521.45,61.45
FX3_DQ6: RS4.4 U4.H10 | length 552.1
  Top Layer w6: v1(230,137) 240,127 429,127 v1(443,141)
  Bottom Layer w6: RS4.4@193.5,414.18 RS4.4 193.5,400.5 230,364 v1(230,137) ; v1(443,141) 443.43,141 U4.H10 U4.H10@458.47,127.53
FX3_DQ7: RS4.3 U4.H9 | length 483.6
  Bottom Layer w6: RS4.3@225,414.18 RS4.3 225,400 254,371 254,185 ; 330,184 330,98 349,79 443,79 U4.H9
  other v1: 333,213 254,215
FX3_DQ8: U4.J10
FX3_DQ9: U4.J9
FX3_DQ10: U4.K11
FX3_DQ11: U4.L10
FX3_DQ12: U4.K10
FX3_DQ13: U4.K9
FX3_DQ14: U4.J8
FX3_DQ15: U4.G8
FX3_I2S_SCL: P3.21 R19.1 U4.D9 U5.6 U6.6 | length 1505
  Top Layer w10: v1(252,658) 486,658 502,642 502,331 527,306 U5.6 v1(649,306) 698.41,306 R19.1 ; U6.6 501.16,491.16
  Bottom Layer w6: U4.D9 567,111.9 567,130 581.53,144.53 594.53,144.53 602,152 602,239 649,286 v1(649,306)
  Bottom Layer w10: P3.21 -108.27,644.73 -95,658 v1(252,658)
FX3_I2S_SDA: P3.22 R18.1 U4.D10 U5.5 U6.5 | length 1647.6
  Top Layer w10: U6.5 v1(470.06,426) 470.06,294 508.06,256 U5.5 656,256 ; v1(669,256) R18.1
  Bottom Layer w6: U4.D10 597.64,125.96 610.57,138.89 622.89,138.89 634,150 634,188 669,223 v1(669,256)
  Bottom Layer w10: P3.22 -127.95,655.05 -102,681 250,681 261,692 261,741 275,755 437,755 470.06,721.94 v1(470.06,426)
FX3_PCLK: RS6.4 U4.J6 | length 842.7
  Top Layer w6: v1(240,28) 243,31 395.98,31 v1(411,15.98)
  Bottom Layer w6: RS6.4 -82.77,379.77 -30,327 -30,161.89 17.89,114 215,114 240,89 v1(240,28) ; v1(411,15.98) U4.J6
FX3_RESET: C44.2 R17.2 U4.C5
FX3_SPI-MISO_UART-TX: U4.C2
FX3_SPI-MOSI_UART-RX: U4.D5
FX3_SPI-SCK_UART-RTS: U4.D4
FX3_SPI-SSN_UART-CTS: U4.C1
GND: C41.1 C42.1 C44.1 C45.2 C46.2 C47.1 C48.2 C49.2 C50.2 C51.2 C52.2 C53.1 C54.2 C55.2 C56.2 C57.2 C58.2 C59.2 C60.2 C61.2 C62.2 C64.2 C65.2 C66.1 C68.2 C69.2 C70.2 C71.2 C72.2 C73.2 C74.2 C75.2 C76.2 C77.2 C78.1 C79.1 C80.2 C261.1 C262.2 C263.1 D7.3 JP6.6 K6.1 P3.1 P3.13 P3.24 P3.25 P14.2 P15.5 P15.6 P16.1 P16.4 P16.7 P17.4 P18.1 P18.4 P18.7 Q7.S Q8.S R20.2 R21.2 R22.2 R158.1 R161.1 R164.2 R165.2 R166.2 R167.2 R168.2 R169.2 R170.2 R171.2 R172.2 R173.2 R174.2 R175.2 S6.9 S6.10 S6.11 S6.12 U4.A1 U4.A8 U4.B2 U4.B4 U4.B7 U4.B8 U4.B9 U4.D8 U4.E2 U4.E6 U4.G1 U4.G11 U4.K3 U4.K4 U4.L1 U4.L2 U4.L3 U4.L6 U4.L11 U5.4 U6.4 U38.3 U38.5 U38.21 U39.5 U40.4 U41.4 U42.4 U43.4 U44.4 U45.4 U46.4 U47.4 U48.4 U49.4 U50.4 U51.4 Y6.2 | length 701.3
  Top Layer w10: v1(-647,2) -624.39,24.61 P16.4
  Bottom Layer w6: U4.L1 U4.L2 U4.L3 U4.K3 U4.K4 ; U4.L11 364,176 371,183 ; U4.G11 489.96,180.96 ; 538,-111.02 U4.E2 ; U4.E6 552.94,13.21 565.86,26.14 565.86,44.42 U4.D8 ; U4.B2 634,-112.55 634,-76.39 U4.B4 ; U4.B7 647.41,47 ; U4.B8 647.41,47 ; U4.B9 641.03,94.47 623.56,77 600.79,77 586.78,62.98 U4.D8 ; 648.41,48 663.92,48 U4.A8 ; U4.D8 600.41,47 647.41,47
  Bottom Layer w10: v1(-647,2) -620.39,-24.61 P18.4
  other v1: -479,-515 -418,151 490,203 367,209 -323,292
  other v5: 411,501
LIV_IO: P3.5 RS4.7 | length 118.4
  Bottom Layer w10: P3.5 206.69,543.31 256.5,493.5 RS4.7
MISO: JP6.4 U38.16 | length 678.5
  Top Layer w10: v1(-121,159) -120,158 -120,121 -108.35,109.35 -108.12,109.35 -91.76,92.99 U38.16
  Bottom Layer w10: JP6.4 -502,334 -193.21,334 -121,261.79 v1(-121,159)
MOSI: JP6.3 U38.15 | length 702.9
  Top Layer w10: v1(-143,129) -143,119 -123.26,99.26 U38.15
  Bottom Layer w10: JP6.3 -537,319 -199.43,319 -143,262.57 v1(-143,129)
NetC45_1: C45.1 C46.1 L5.1 U4.B6 | length 135.3
  Top Layer w10: L5.1 606.59,15.41 v1(632,15.41) ; v1@632,13.41 v1@634,13.41 ; C46.1 v1(632,15.41) ; C45.1@662.82,15.41 v1(632,15.41)
  Bottom Layer w6: v1(632,15.41) U4.B6
NetP4_1: P4.1 R14.1 | length 84.1
  Top Layer w10: P4.1 424.18,-737.18 R14.1
NetP4_2: P4.2 U4.G4
NetQ7_D: Q7.D U40.3 U41.3 U42.3 U43.3 U44.3 U45.3 | length 1748.8
  Top Layer w10: Q7.D -330,-41 -312,-59 v1(-312,-95) ; 49.4,-245.4 U41.3 108.67,-268 215.65,-268 v1(225.63,-258.02) ; U42.3 111.67,-121 217,-121 ; U42.3@89,-91 48,-132 48,-385 57.4,-394.4 U40.3 v1@134.6,-394.4
  Bottom Layer w10: v1(-312,-95) -312,-192 -298,-206 -298,-413 -265,-446 111,-446 134.09,-422.91 v1@134.09,-394.8 ; v1(135,-394.8) U43.3 ; U44.3 212.81,-245.19 v1(225.63,-258.02) ; U45.3 211.59,-95.59 v1(227,-111)
NetQ8_D: Q8.D U46.3 U47.3 U48.3 U49.3 U50.3 U51.3 | length 1067.2
  Top Layer w10: Q8.D -274,-179 -261.25,-166.25 v1(-261.25,-108.25) ; v1(-199.5,-108.5) -186.59,-95.59 U48.3 ; v1@-194,-258 -181.19,-245.19 U47.3 ; U46.3@-163.8,-394.8 U46.3 -111.2,-394.8 v1@-111,-395
  Bottom Layer w10: v1@-261.25,-108.5 v1(-199.5,-108.5) -188,-120 -57,-120 ; v1(-200,-259) -191,-268 -146,-268 ; -171,-268 -146,-268 ; v1(-110.4,-394.4) U49.3 -33.4,-394.4 -22,-383 -22,-155 -57,-120 ; U50.3 -58.5,-255.5 -71,-268 -146,-268 ; U51.3 -57.5,-119.5 -57,-120
NetR12_1: R12.1 V2.1
NetR15_1: R15.1 U4.H4 | length 84.2
  Top Layer w10: R15.1 431.82,-101.43 431.82,-90.18 v1(444,-78)
  Bottom Layer w6: v1(444,-78) 458.47,-63.53 U4.H4
NetR21_1: R21.1 U4.C8 | length 53.7
  Bottom Layer w6: U4.C8 625.98,62.98 642,79 v1(663,79)
NetR22_1: R22.1 U4.B3 | length 62.2
  Top Layer w10: v1(662.94,-110) R22.1@703.19,-110
  Bottom Layer w6: U4.B3 v1(662.94,-110)
NetR164_1: R164.1 U40.5 U40.6 | length 101.8
  Top Layer w20: U40.6 U40.5 R164.1
NetR165_1: R165.1 U41.5 U41.6 | length 99.8
  Top Layer w20: U41.6 U41.5 R165.1@246.9,-208
NetR166_1: R166.1 U42.5 U42.6 | length 37.4
  Top Layer w20: U42.5 U42.6
NetR167_1: R167.1 U43.5 U43.6 | length 112.7
  Bottom Layer w20: R167.1 84.89,-320.62 U43.6 U43.5
NetR168_1: R168.1 U44.5 U44.6 | length 112.6
  Bottom Layer w20: R168.1 84.94,-170.96 U44.6 U44.5
NetR169_1: R169.1 U45.5 U45.6 | length 112
  Bottom Layer w20: R169.1 U45.6@85.09,-20.37 ; U45.5 U45.6
NetR170_1: R170.1 U46.5 U46.6 | length 105.8
  Top Layer w20: U46.5 U46.6 R170.1@9.88,-320
NetR171_1: R171.1 U47.5 U47.6 | length 105.8
  Top Layer w20: U47.5 U47.6 R171.1@9.93,-170.39
NetR172_1: R172.1 U48.5 U48.6 | length 106.6
  Top Layer w20: U48.5 U48.6 10.08,-20.79 R172.1
NetR173_1: R173.1 U49.5 U49.6 | length 93.6
  Bottom Layer w20: R173.1 -210.33,-357 U49.5 U49.6
NetR174_1: R174.1 U50.5 U50.6 | length 91.9
  Bottom Layer w20: R174.1@-211.41,-208 U50.5 U50.6
NetR175_1: R175.1 U51.5 U51.6 | length 93.8
  Bottom Layer w20: R175.1 U51.5 U51.6
OSC_IN: U38.7 Y6.3 | length 99.2
  Top Layer w10: Y6.3@-457,196.59 -431.59,196.59 -399.6,164.6 U38.7
OSC_OUT: U38.8 Y6.1 | length 98.8
  Top Layer w10: Y6.1@-457,102.1 -433.9,102.1 -402.89,133.11 U38.8
OTG_ID: R20.1 U4.C9 | length 53.5
  Bottom Layer w6: U4.C9 625.47,94.47 641,110 v1(663,110)
OUT1: P17.2 U46.1 U47.1 U48.1 U49.1 U50.1 U51.1 | length 1818.4
  Top Layer w20: -225.39,-170.39 U47.1 ; U46.1 -197,-320 v2(-231,-286) -231,-47 -204.79,-20.79 U48.1 -125.9,-20.79 v2(-108,-2.89) -85.11,20 51,20 83,52 83,326 -13.39,422.39 P17.2
  Bottom Layer w20: v2@-231,-288 -90.1,-288 U49.1 ; v2(-231,-141) -88.1,-141 U50.1 ; v2(-108,-2.89) -90.29,-20.6 U51.1
OUT2: P17.3 U40.1 U41.1 U42.1 U43.1 U44.1 U45.1 | length 1902.1
  Top Layer w20: v2(-177,471.19) -110.81,471.19 -62.61,519.39 P17.3 ; U40.1 115.89,-289.78 v2(258,-289.78) ; U41.1 113.67,-143 v2(258,-143) ; U42.1 118.48,-20.6
  Bottom Layer w20: v2@-177,471 -177,377 -70,270 -70,60.54 -23.46,14 118.92,14 v2(136,-3.08) 153.71,-20.79 U45.1 241.24,-20.79 258,-37.55 v2(258,-143) 258,-289 227,-320 U43.1 ; U44.1 257.61,-170.39
PCK_IO: P3.20 RS6.5 | length 100.7
  Bottom Layer w10: P3.20 -88.58,524.58 -84,520 -84,482.73 RS6.5
RESET: C260.2 JP6.1 K6.2 R153.2 U38.29 | length 1140.4
  Top Layer w10: C260.2@-749.59,382 JP6.1 ; K6.2 -397.11,735 -415,717.11 R153.2 -415,521 -392,498 -247.13,498 -235,498 -217.75,480.75 U38.29 -217.75,372.25 v1(-218,372)
  Bottom Layer w10: JP6.1 -670,412 -258,412 v1(-218,372)
RX/B: D7.1 P16.3 P18.3 R160.2 R161.2 U39.7 | length 797.6
  Top Layer w10: v1(-721,73.82) P16.3 ; D7.1 -514,-354 ; R161.2 R160.2 -360.59,-380.41 -350,-391 U39.7
  Bottom Layer w10: v1(-721,73.82) -721,-35 -682.18,-73.82 P18.3
RXI: P15.4 U38.30 U39.1 | length 1285.6
  Top Layer w10: v1(-326,-217) -300,-243 U39.1 ; v1(-249.24,469) U38.30 -249.24,331.24 v1(-206.52,288.52) v1@-203,285
  Bottom Layer w10: P15.4 -541.98,442 -512.3,471.69 -251.93,471.69 v1(-249.24,469) ; v1(-326,-217) -336,-207 -336,-10 -320,6 -202.79,6 -166,42.79 -166,248 v1(-206.52,288.52)
RXVDDQ: C79.2 C80.1 L7.2 U4.A2 | length 230.7
  Top Layer w10: v1(664,-140.86) 648.86,-156 L7.2 607,-202.5 C79.2 641.68,-236.82 C80.1
  Bottom Layer w6: v1(664,-140.86) U4.A2
SCK: JP6.5 U38.17 | length 644.8
  Top Layer w10: v1(-97,133.11) U38.17
  Bottom Layer w10: JP6.5 JP6.5@-499,381 ; JP6.5@-499,382 JP6.5@-499,381 ; v1(-97,133.11) -97,259 -187,349 -467,349 JP6.5@-499,381
SST_N: C67.2 U4.A6 | length 21.1
  Bottom Layer w6: U4.A6 700,0
SST_P: C63.2 U4.A5 | length 13.6
  Bottom Layer w6: U4.A5 692.49,-31.49
STB_IO: P3.2
TIGG_IO: P3.3 R13.1 | length 154
  Bottom Layer w10: P3.3 246.06,548.94 255,540 284.21,540 337,487.21 R13.1
TX/A: D7.2 P16.2 P18.2 R159.2 R160.1 U39.6 | length 827.1
  Top Layer w10: v1(-648,-123) -711,-123 -743,-91 -743,103 -722.97,123.03 P16.2 ; D7.2 R160.1@-516.41,-434 ; R159.2 R160.1 -418.41,-431.59 -400,-450 U39.6
  Bottom Layer w10: v1(-648,-123) P18.2
TXO: P15.3 U38.31 U39.4 | length 1362.2
  Top Layer w10: P15.3 -591.98,442 -562.3,471.69 -298.69,471.69 -280.74,453.74 U38.31 -280.74,318.74 v1@-207.5,245.5 ; U39.4 -450,-276 -426,-252 -360,-252 v1(-351,-243)
  Bottom Layer w10: v1(-351,-243) -351,-2 -328,21 -209,21 -181,49 -181,220.5 v1(-206,245.5)
TXVDDQ: C66.2 C68.1 L8.2 U4.B5 | length 318.8
  Top Layer w10: C68.1 C66.2@580.32,-236.82 ; C66.2 580.5,-123.5 L8.2 642,-98 660,-80 660,-79 v1(663,-79)
  Bottom Layer w6: U4.B5 663,-47.08 v1(663,-79)
USB_DS2_DM: U4.A10
USB_DS2_DP: U4.A9
USB_DS2_RXM: U4.A4
USB_DS2_RXP: U4.A3
USB_DS2_TXM: C67.1
USB_DS2_TXP: C63.1
UTIGGER: P14.1 R158.2 S6.5 S6.6 | length 149.4
  Top Layer w10: S6.5 S6.6 ; R158.2@231,-737 P14.1 P14.1@302.41,-748.59
VCC(+3.3V): C47.2 C55.1 C56.1 C57.1 C58.1 C59.1 C60.1 C69.1 C70.1 C71.1 C72.1 C73.1 C74.1 C75.1 C76.1 C77.1 L5.2 P3.27 P3.28 P3.29 P3.30 R12.2 R14.2 R15.2 R16.1 R17.1 R18.2 R19.2 U4.B1 U4.C11 U4.E3 U4.E10 U4.F1 U4.H11 U4.L9 U5.8 U6.8 | length 700.5
  Top Layer w10: R15.2 466,-118.43 466,-24 508,18 L5.2
  Bottom Layer w6: U4.L9 380,110.47 380,141 ; 380,154 380,141 ; U4.H11 458.47,182 ; U4.E10 552.94,132.94 569,149 569,198.72 574,203.72 574,220.28 562.28,232 443,232 380,169 380,141 ; U4.C11 615.92,201.92
  other v1: 460,203
VCC(+5V): C48.1 C262.1 C263.2 JP6.2 P15.2 R153.1 R154.1 R155.1 R156.1 R157.1 R159.1 R163.2 U4.E11 U38.4 U38.6 U38.18 U39.8 | length 2194.7
  Top Layer w20: JP6.2 P15.2 -597,495 -500.42,495 -466.18,529.24 R153.1 ; R159.1 -514,-566 -481,-599 -326,-599 -300,-573 U39.8 -240.8,-498 -239,-496.2 R163.2 ; v2(-441,259) -440.9,259.1 U38.4 -333.1,259.1 -270.11,196.11 U38.6 ; v4@-262,196 -107,196 -75.61,164.61 U38.18 ; U38.18@-32.57,164.18 v2(42,164.18) C262.1@42,128 ; C262.1 C262.1@41,127
  Bottom Layer w10: v2(42,164.18) 58.82,181 v1(170,181) ; U4.E11 v1(552.94,212)
  Bottom Layer w15: R155.1 R156.1 -272.07,206.18 v4(-262,196.11) ; v4@-252.52,205.59 R157.1 -240.82,221.41 R154.1
  Bottom Layer w20: JP6.2 -650,322 -587,259 v2(-441,259)
VCC_9V: P16.8 P17.1 P18.8 U40.2 U41.2 U42.2 U43.2 U44.2 U45.2 U46.2 U47.2 U48.2 U49.2 U50.2 U51.2 | length 1836
  Top Layer w20: U46.2 -124.4,-357.4 v2(-107,-340) v2(-107,-189) ; U47.2 -125.79,-207.79 v2(-107,-189) ; U48.2 -127.81,-58.19 v2(-107,-79) v2(-107,-189) ; U40.2 120,-357 v2(136,-341) ; U41.2 v2(135,-208) ; U42.2 119,-58 v2(136,-75)
  Top Layer w25: v3(-672.24,-172.24) P16.8
  Bottom Layer w20: v2(-107,-340) -90,-357 U49.2 ; v2(-107,-189) -88,-208 U50.2 ; v2(-107,-79) -86,-58 U51.2 ; v2@136.21,-207.79 U44.2 ; U43.2 152.4,-357.4 v2(136,-341) v2(136,-75) 152.81,-58.19 U45.2
  Bottom Layer w25: v3(-672.24,-172.24) -736.76,-172.24 -754,-155 -754,137 -718.76,172.24 P18.8
VDD(+1.2V): C49.1 C50.1 C51.1 C52.1 C61.1 C62.1 C64.1 C65.1 C78.2 L6.1 L7.1 L8.1 U4.B10 U4.C3 U4.E9 U4.F11 U4.H1 U4.J11 U4.L5 U4.L7 | length 868.8
  Bottom Layer w6: U4.L5 379.51,-31.49 380,-31 ; U4.L7 380,15.49 380,-31 ; U4.J11@426.98,155.98 U4.J11 426.98,188.42 441.56,203 525,203 538,190 538,157 ; U4.H1 458.47,-143 ; U4.F11 537.55,157.45 538,157 ; U4.C3 603,-107.39 603,-134.33 594.32,-143 458.47,-143 ; U4.B10 636.96,125.96 620,109 603,109 597.36,103.36 597.36,89.12 589.78,81.54 565.86,81.54 U4.E9 538,109.41 538,157 ; 380,-31 380,-38 389,-47 406,-47 412,-53 412,-133 422,-143 458.47,-143
XCK_IO: P3.19
XTAL_IN: C42.2 U4.C6 Y2.1 | length 635.1
  Top Layer w6: C42.2 476,-197.56 506,-167.56 v1(505.98,-47.02)
  Top Layer w10: Y2.1 414.62,-459.82 C42.2@474,-459.82 ; C42.2@473.68,-459.5 C42.2@474,-459.82 ; C42.2@476,-461.82 C42.2@474,-459.82 ; C42.2 C42.2@474,-459.82
  Bottom Layer w6: v1(505.98,-47.02) 595,-47 603,-39 603,-12.93 U4.C6
XTAL_OUT: C41.2 U4.C7 Y2.2 | length 823.8
  Top Layer w6: Y2.2 373,-477.19 373,-447 391,-429 452,-429 464.5,-416.5 464.5,-193.5 485,-173 485,-37 v1(505.97,-15.97) v1(505.97,-15.97)
  Top Layer w10: C41.2 327.38,-522.18 Y2.2 Y2.2@328,-522.8
  Bottom Layer w6: v1(505.97,-15.97) 563,-16 570,-9 570,12 576.82,18.82 578.82,18.82 579.08,18.57 603,18.57 610.21,25.79 ; 607.21,22.79 610.21,25.79 ; U4.C7 610.21,25.79
pads on no net: P3.31 P16.9 P17.7 P18.9 RS6.3 RS6.6 U4.A11 U4.B11 U4.C4 U4.C10 U4.D1 U4.D2 U4.D3 U4.D7 U4.D11 U4.E1 U4.E4 U4.E5 U4.E7 U4.E8 U4.F2 U4.F3 U4.F4 U4.F5 U4.F6 U4.G2 U4.G3 U4.H2 U4.H3 U4.H6 U4.J1 U4.J2 U4.J3 U4.J4 U4.K1 U4.K2 U4.K5 U4.L4 U5.1 U5.2 U5.3 U5.7 U6.1 U6.2 U6.3 U6.7 Y2.3 Y2.4

## Keep-outs
Keep-Out Layer:
  lines w7.87: 629.92,787.4 cw(c629.92,629.92) 787.4,629.92 ; 629.92,787.4 787.4,787.4 787.4,629.92 ; 629.92,787.4 -629.92,787.4 ccw(c-629.92,629.92) -787.4,629.92 -787.4,-629.92 ccw(c-629.92,-629.92) -629.92,-787.4 629.92,-787.4 ccw(c629.92,-629.92) 787.4,-629.92 787.4,629.92

## Text inside footprints (layer, text, board x,y; h text height)
P3: Bottom Overlay "30" at -305,545.55 h60 r180; Bottom Overlay "1" at 301,554.55 h60 r180
S6: Top Overlay "6" at 115,-697 h19.68; Top Overlay "5" at 70,-697 h19.68; Top Overlay "1" at -130,-697 h19.68; Top Overlay "2" at -80,-697 h19.68; Top Overlay "3" at -30,-697 h19.68; Top Overlay "4" at 15,-697 h19.68; Top Overlay "ON" at 151,-473 h60
U4: Bottom Overlay "L" at 355.05,-230.6 h55 r270; Bottom Overlay "A" at 649.05,-235.6 h55 r270; Bottom Overlay "11" at 731.45,205 h55; Bottom Overlay "1" at 753.95,-185.2 h55; Mechanical 15 "A" at 681.45,-230 h55 r270; Mechanical 15 "L" at 346.45,-229 h55 r270; Mechanical 15 "11" at 731.45,150 h55 r270; Mechanical 15 "1" at 736.45,-165 h55 r270; Mechanical 16 "E10" at 586.54,125.96 h55 r270; Mechanical 16 "D11" at 618.03,157.45 h55 r270; Mechanical 16 "A11" at 712.5,157.45 h55 r270; Mechanical 16 "C9" at 638.32,94.47 h55 r270; Mechanical 16 "F2" at 543.85,-125.96 h55 r270; Mechanical 16 "E3" at 575.34,-94.47 h55 r270; Mechanical 16 "F1" at 543.85,-157.45 h55 r270; Mechanical 16 "L9" at 386.4,94.47 h55 r270; Mechanical 16 "H11" at 492.07,157.45 h55 r270; Mechanical 16 "J4" at 449.38,-62.98 h55 r270; Mechanical 16 "F4" at 543.85,-62.98 h55 r270; Mechanical 16 "J3" at 449.38,-94.47 h55 r270; Mechanical 16 "J1" at 449.38,-157.45 h55 r270; Mechanical 16 "E4" at 575.34,-62.98 h55 r270; Mechanical 16 "E5" at 575.34,-31.49 h55 r270; Mechanical 16 "G2" at 512.36,-125.96 h55 r270; Mechanical 16 "F5" at 543.85,-31.49 h55 r270; Mechanical 16 "K2" at 417.89,-125.96 h55 r270; Mechanical 16 "E1" at 575.34,-157.45 h55 r270; Mechanical 16 "G8" at 512.36,62.98 h55 r270; Mechanical 16 "L10" at 397.6,125.96 h55 r270; Mechanical 16 "F8" at 543.85,62.98 h55 r270; Mechanical 16 "F3" at 543.85,-94.47 h55 r270; Mechanical 16 "K1" at 417.89,-157.45 h55 r270; Mechanical 16 "J10" at 460.58,125.96 h55 r270; Mechanical 16 "G6" at 512.36,0 h55 r270; Mechanical 16 "K6" at 417.89,0 h55 r270; Mechanical 16 "K9" at 417.89,94.47 h55 r270; Mechanical 16 "J9" at 449.38,94.47 h55 r270; Mechanical 16 "F10" at 555.05,125.96 h55 r270; Mechanical 16 "H9" at 480.87,94.47 h55 r270; Mechanical 16 "J5" at 449.38,-31.49 h55 r270; Mechanical 16 "G9" at 512.36,94.47 h55 r270; Mechanical 16 "K11" at 429.09,157.45 h55 r270; Mechanical 16 "G10" at 523.56,125.96 h55 r270; Mechanical 16 "H10" at 492.07,125.96 h55 r270; Mechanical 16 "J8" at 449.38,62.98 h55 r270; Mechanical 16 "K10" at 429.09,125.96 h55 r270; Mechanical 16 "F7" at 543.85,31.49 h55 r270; Mechanical 16 "G5" at 512.36,-31.49 h55 r270; Mechanical 16 "K5" at 417.89,-31.49 h55 r270; Mechanical 16 "H8" at 480.87,62.98 h55 r270; Mechanical 16 "H6" at 480.87,0 h55 r270; Mechanical 16 "H5" at 480.87,-31.49 h55 r270; Mechanical 16 "F9" at 543.85,94.47 h55 r270; Mechanical 16 "H3" at 480.87,-94.47 h55 r270; Mechanical 16 "G3" at 512.36,-94.47 h55 r270; Mechanical 16 "H2" at 480.87,-125.96 h55 r270; Mechanical 16 "J2" at 449.38,-125.96 h55 r270; Mechanical 16 "B11" at 681.01,157.45 h55 r270; Mechanical 16 "E8" at 575.34,62.98 h55 r270; Mechanical 16 "C10" at 649.52,125.96 h55 r270; Mechanical 16 "E7" at 575.34,31.49 h55 r270; Mechanical 16 "F6" at 543.85,0 h55 r270; Mechanical 16 "B6" at 669.81,0 h55 r270; Mechanical 16 "D2" at 606.83,-125.96 h55 r270; Mechanical 16 "C4" at 638.32,-62.98 h55 r270; Mechanical 16 "C5" at 638.32,-31.49 h55 r270; Mechanical 16 "D1" at 606.83,-157.45 h55 r270; Mechanical 16 "D4" at 606.83,-62.98 h55 r270; Mechanical 16 "K8" at 417.89,62.98 h55 r270; Mechanical 16 "J6" at 449.38,0 h55 r270; Mechanical 16 "J7" at 449.38,31.49 h55 r270; Mechanical 16 "C8" at 638.32,62.98 h55 r270; Mechanical 16 "B3" at 669.81,-94.47 h55 r270; Mechanical 16 "H7" at 480.87,31.49 h55 r270; Mechanical 16 "A5" at 701.3,-31.49 h55 r270; Mechanical 16 "G7" at 512.36,31.49 h55 r270; Mechanical 16 "A6" at 701.3,0 h55 r270; Mechanical 16 "K7" at 417.89,31.49 h55 r270; Mechanical 16 "C2" at 638.32,-125.96 h55 r270; Mechanical 16 "D3" at 606.83,-94.47 h55 r270; Mechanical 16 "D5" at 606.83,-31.49 h55 r270; Mechanical 16 "D7" at 606.83,31.49 h55 r270; Mechanical 16 "D6" at 606.83,0 h55 r270; Mechanical 16 "C1" at 638.32,-157.45 h55 r270; Mechanical 16 "E9" at 575.34,94.47 h55 r270; Mechanical 16 "B10" at 681.01,125.96 h55 r270; Mechanical 16 "L7" at 386.4,31.49 h55 r270; Mechanical 16 "L5" at 386.4,-31.49 h55 r270; Mechanical 16 "H1" at 480.87,-157.45 h55 r270; Mechanical 16 "C3" at 638.32,-94.47 h55 r270; Mechanical 16 "J11" at 460.58,157.45 h55 r270; Mechanical 16 "F11" at 555.05,157.45 h55 r270; Mechanical 16 "D9" at 606.83,94.47 h55 r270; Mechanical 16 "D10" at 618.03,125.96 h55 r270; Mechanical 16 "A4" at 701.3,-62.98 h55 r270; Mechanical 16 "E11" at 586.54,157.45 h55 r270; Mechanical 16 "A7" at 701.3,31.49 h55 r270; Mechanical 16 "A10" at 712.5,125.96 h55 r270; Mechanical 16 "A9" at 701.3,94.47 h55 r270; Mechanical 16 "A3" at 701.3,-94.47 h55 r270; Mechanical 16 "G4" at 512.36,-62.98 h55 r270; Mechanical 16 "H4" at 480.87,-62.98 h55 r270; Mechanical 16 "L8" at 386.4,62.98 h55 r270; Mechanical 16 "L4" at 386.4,-62.98 h55 r270; Mechanical 16 "C7" at 638.32,31.49 h55 r270; Mechanical 16 "B2" at 669.81,-125.96 h55 r270; Mechanical 16 "B4" at 669.81,-62.98 h55 r270; Mechanical 16 "E6" at 575.34,0 h55 r270; Mechanical 16 "C6" at 638.32,0 h55 r270; Mechanical 16 "B1" at 669.81,-157.45 h55 r270; Mechanical 16 "C11" at 649.52,157.45 h55 r270; Mechanical 16 "A2" at 701.3,-125.96 h55 r270; Mechanical 16 "B5" at 669.81,-31.49 h55 r270; Mechanical 16 "L6" at 386.4,0 h55 r270; Mechanical 16 "A1" at 701.3,-157.45 h55 r270; Mechanical 16 "E2" at 575.34,-125.96 h55 r270; Mechanical 16 "L2" at 386.4,-125.96 h55 r270; Mechanical 16 "L1" at 386.4,-157.45 h55 r270; Mechanical 16 "K3" at 417.89,-94.47 h55 r270; Mechanical 16 "G1" at 512.36,-157.45 h55 r270; Mechanical 16 "K4" at 417.89,-62.98 h55 r270; Mechanical 16 "L3" at 386.4,-94.47 h55 r270; Mechanical 16 "A8" at 701.3,62.98 h55 r270; Mechanical 16 "B8" at 669.81,62.98 h55 r270; Mechanical 16 "B9" at 669.81,94.47 h55 r270; Mechanical 16 "D8" at 606.83,62.98 h55 r270; Mechanical 16 "B7" at 669.81,31.49 h55 r270; Mechanical 16 "L11" at 397.6,157.45 h55 r270; Mechanical 16 "G11" at 523.56,157.45 h55 r270